# Altium PCB PCB_Working.PcbDoc
Units mil, origin at the board's own origin, x right, y up, seen from the top; angles counter-clockwise.
Board outline 6850 x 6635 mil, 2 copper layers (Top Layer, Bottom Layer); 104 components, 79 nets, 346 pads, 70 vias.
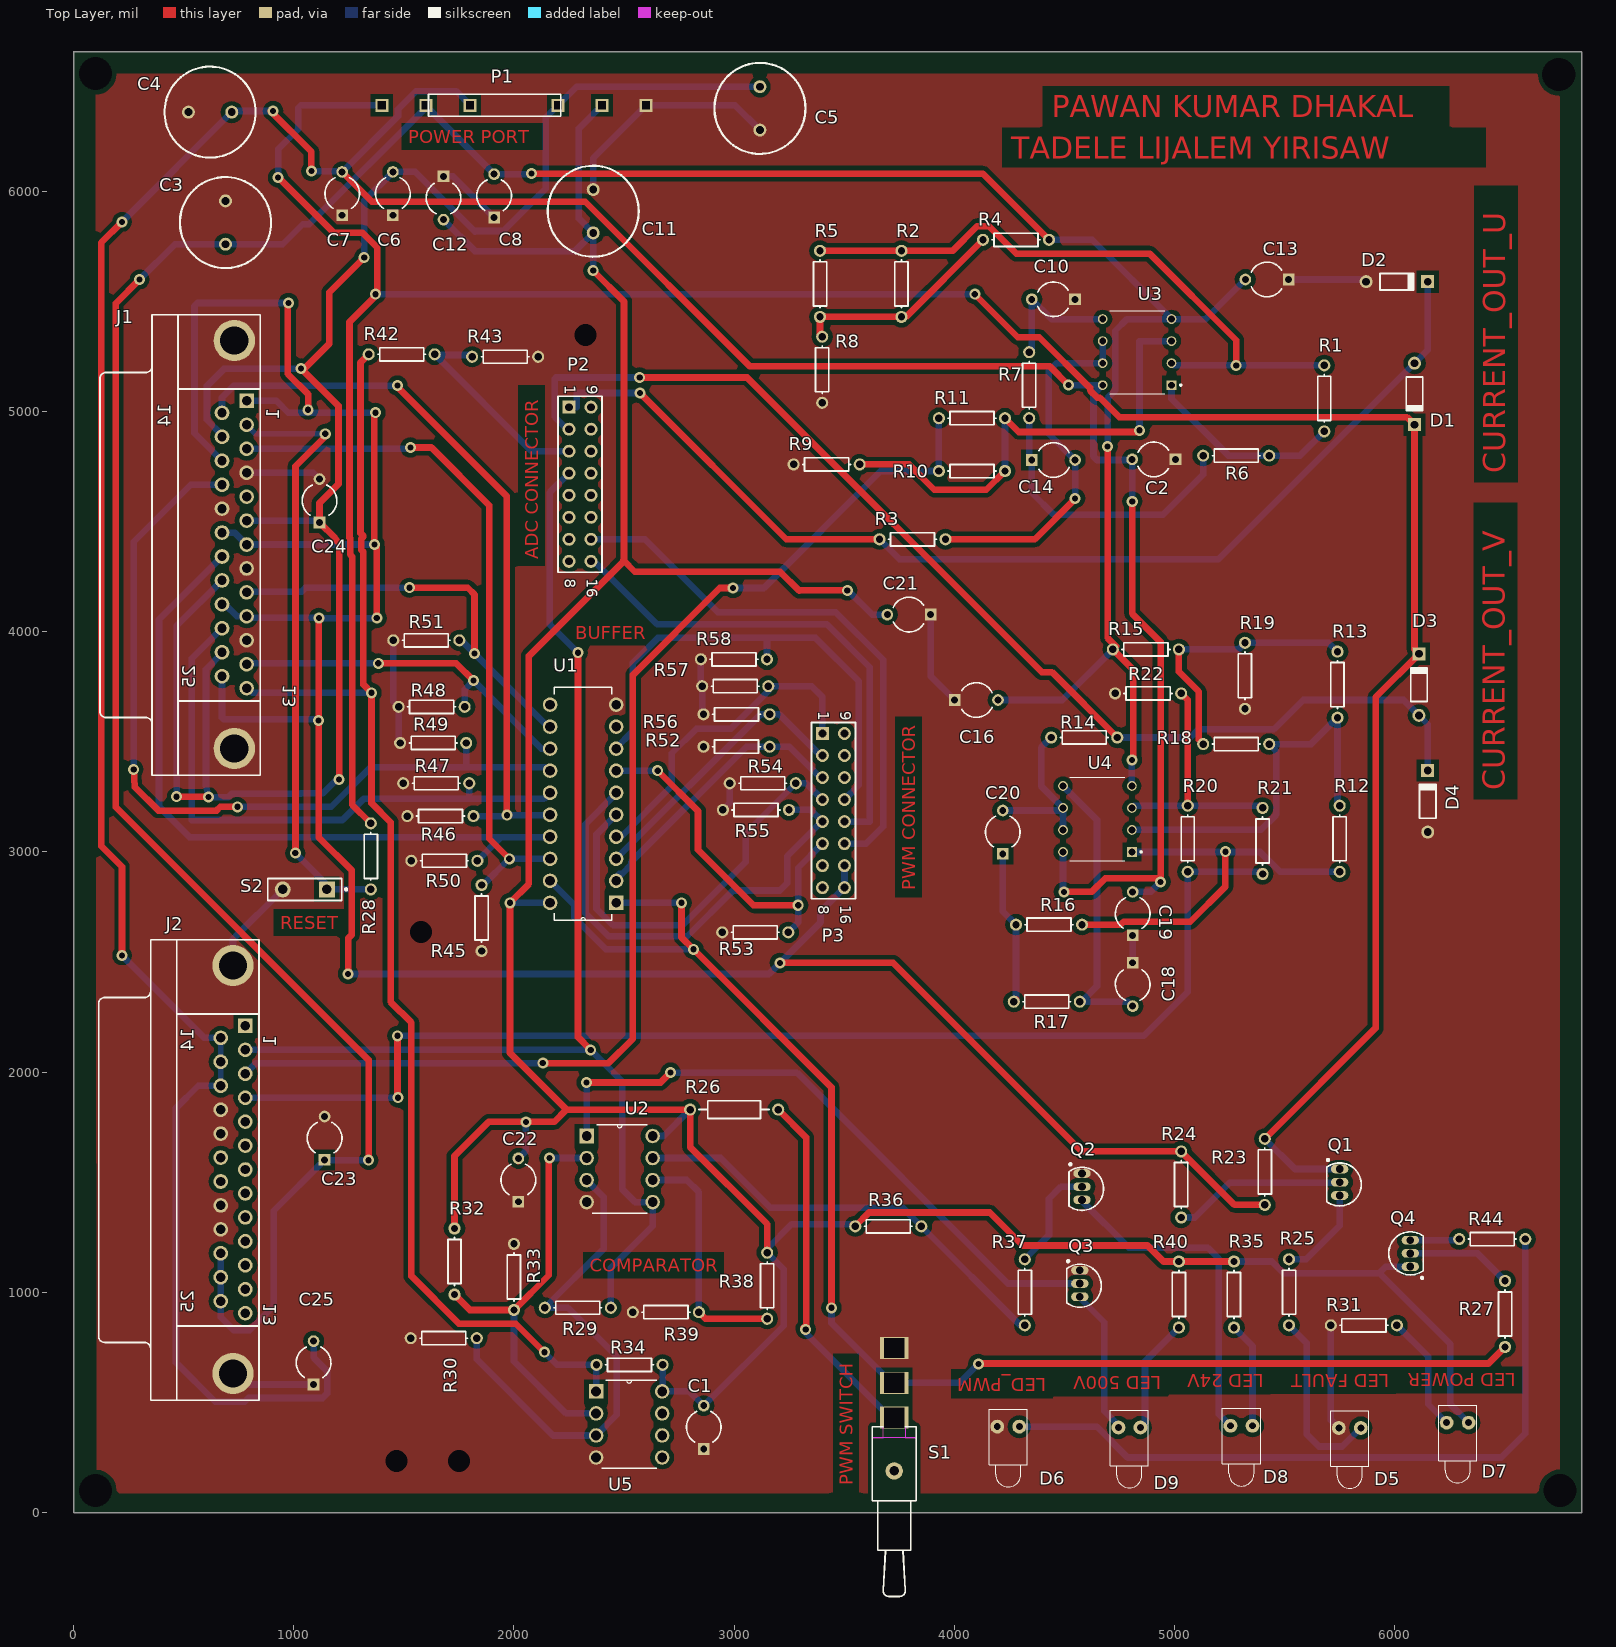
[diagram p0: Top Layer view]
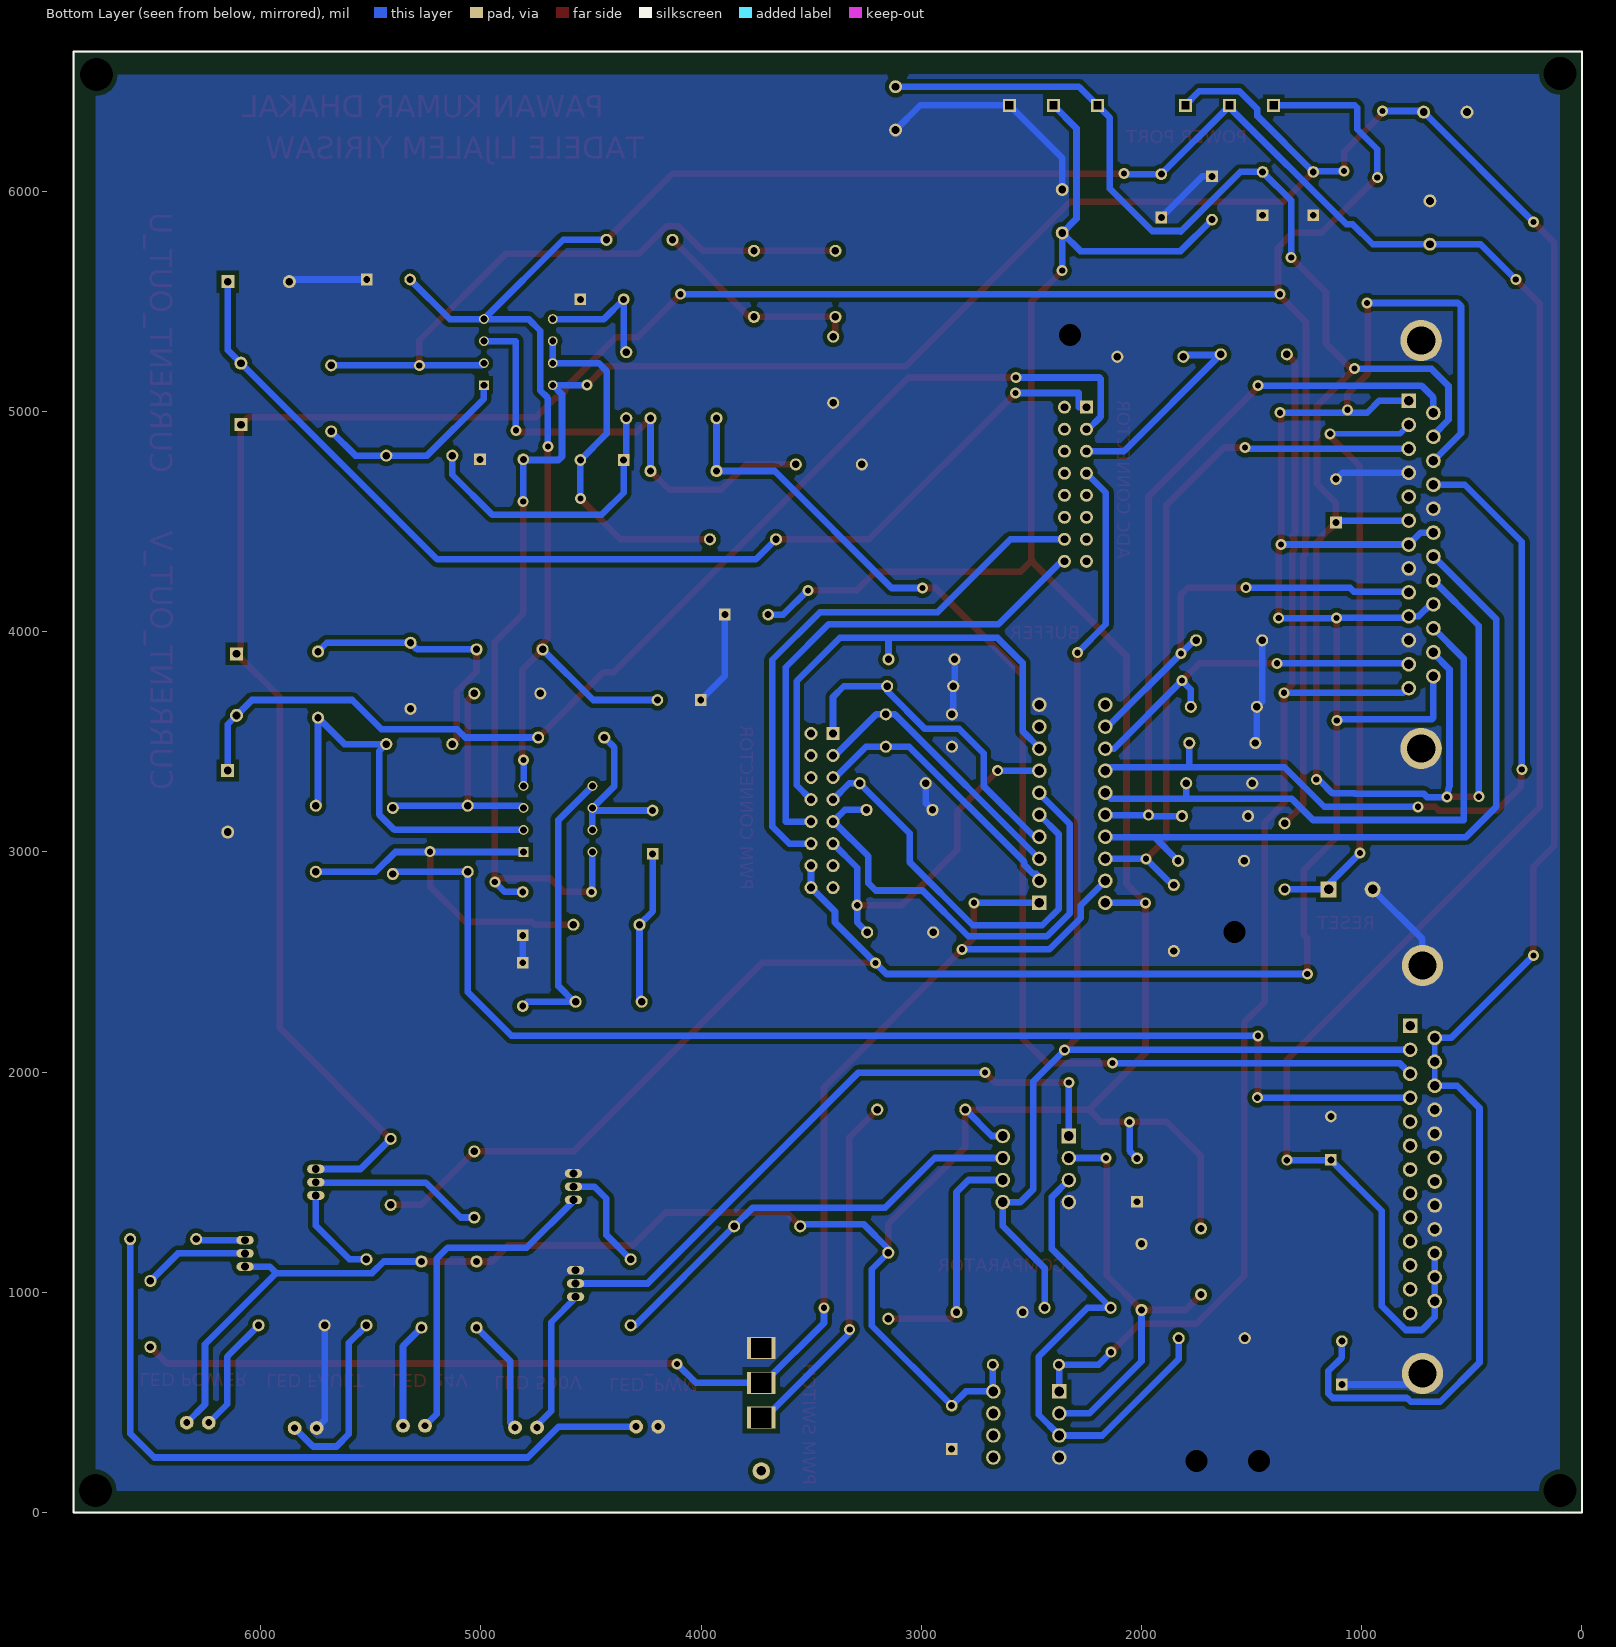
[diagram p1: Bottom Layer view, seen from below]

## Layer stack, top to bottom
Top Solder: solder mask 0.4, Solder Resist, Dk 3.5
Top Layer: signal copper 1.4
Dielectric 1: dielectric 12.6, FR-4, Dk 4.8
Bottom Layer: signal copper 1.4
Bottom Solder: solder mask 0.4, Solder Resist, Dk 3.5

## Board outline
0,0 0,6635 6850,6635 6850,0

## Design rules (kind name [scope] priority, off if disabled: settings)
Clearance [All] p1: gap=20
HoleSize [All] p1: absolutevalues=TRUE maxlimit=300 minlimit=20 maxpercent=80.000 minpercent=20.000
MinimumSolderMaskSliver [All] p1: minsoldermaskwidth=1
PlaneConnect [All] p1: planeconnectstyle=Direct reliefexpansion=20 reliefentries=4 reliefconductorwidth=10 reliefairgap=10
PolygonConnect [All] p1: connectstyle=Direct reliefconductorwidth=10 reliefentries=4 polygonreliefangle="90 Angle" airgapwidth=10
RoutingPriority [InNet('GND')] p1: routingpriority=82
RoutingVias [All] p1: holewidth=28 width=50 viastyle="Through Hole" minholewidth=28 minwidth=50 maxholewidth=28 maxwidth=50
SilkToSilkClearance [All] p1: silktosilkclearance=0
SilkToSolderMaskClearance [IsPad] p1: minsilkscreentomaskgap=1 clearancetoexposedcopper=TRUE
SolderMaskExpansion [All] p1: expansion=4
Width "Net Tracks" [All] p1: maxlimit=100 minlimit=20 preferedwidth=30
24 further rules are at their usual default settings.

## Components (designator, comment, footprint, x,y, rotation, side; value= is the part's Value field where it differs from the comment)
C1 "Cap2" CAPR5-4X5 2862,387 r90 top
C2 "Cap2" CAPR5-4X5 4906,4783 r180 top
C3 "Cap Pol1" RB5-10.5 690,5858.43 r270 top
C4 "Cap Pol1" RB5-10.5 620,6360 r180 top
C5 "Cap Pol1" RB5-10.5 3117,6377 r270 top
C6 "Cap2" CAPR5-4X5 1450,5990 r90 top
C7 "Cap2" CAPR5-4X5 1220,5990 r90 top
C8 "Cap2" CAPR5-4X5 1910,5980 r90 top
C10 "Cap2" CAPR5-4X5 4450,5510 r180 top
C11 "Cap Pol1" RB5-10.5 2360,5910 r90 top
C12 "Cap2" CAPR5-4X5 1680,5970 r270 top
C13 "Cap2" CAPR5-4X5 5420,5600 r180 top
C14 "Cap2" CAPR5-4X5 4450,4780 r0 top
C16 "Cap2" CAPR5-4X5 4100,3690 r0 top
C18 "Cap2" CAPR5-4X5 4810,2398.42 r270 top
C19 "Cap2" CAPR5-4X5 4810,2720 r90 top
C20 "Cap2" CAPR5-4X5 4220,3090 r90 top
C21 "Cap2" CAPR5-4X5 3794,4078 r180 top
C22 "Cap2" CAPR5-4X5 2020,1510 r90 top
C23 "Cap2" CAPR5-4X5 1140,1700 r90 top
C24 "Cap2" CAPR5-4X5 1117,4595 r90 top
C25 "Cap2" CAPR5-4X5 1090,680 r90 top
D1 "Diode 1N914" DO-35 6090,5080 r270 top
D2 "Diode 1N914" DO-35 6010,5590 r0 top
D3 "Diode 1N914" DO-35 6110,3760 r90 top
D4 "Diode 1N914" DO-35 6150,3230 r90 top
D5 "LED1" LED-1 5796,384 r270 top
D6 "LED1" LED-1 4245,390 r270 top
D7 "LED1" LED-1 6286,408 r270 top
D8 "LED1" LED-1 5304,394 r270 top
D9 "LED1" LED-1 4795,386 r270 top
J1 "J1 CONNECTOR, CONTROL" DSUB1.385-2H25A 355.98,4396.22 r270 top
J2 "J2 CONNECTOR, SENSOR" DSUB1.385-2H25A 350.08,1557.8 r270 top
P1 "POWER CONNECTORS" HDR1X6 2162,6391 r180 top
P2 "CONNECTOR ADC CHANNEL" HDR2X8_CEN 2250,5020 r270 top
P3 "CONNECTOR PWM" HDR2X8_CEN 3401,3538 r270 top
Q1 "2N3906" TO-92A#1 5750,1490 r180 top
Q2 "2N3904" TO-92A#1 4580,1470 r180 top
Q3 "2N3904" TO-92A#1 4570,1030 r180 top
Q4 "2N3906" TO-92A#2 6071,1177 r0 top
R1 "Res1" AXIAL-0.3 5680,5060 r90 top
R2 "Res1" AXIAL-0.3 3760,5580 r270 top
R3 "Res1" AXIAL-0.3 3810,4420 r180 top
R4 "Res1" AXIAL-0.3 4280,5780 r180 top
R5 "Res1" AXIAL-0.3 3390,5580 r270 top
R6 "Res1" AXIAL-0.3 5280,4800 r0 top
R7 "Res1" AXIAL-0.3 4340,5120 r270 top
R8 "Res5" AXIAL-0.3 3400,5190 r90 top
R9 "Res1" AXIAL-0.3 3420,4760 r180 top
R10 "Res1" AXIAL-0.3 4080,4730 r180 top
R11 "Res1" AXIAL-0.3 4080,4970 r180 top
R12 "Res1" AXIAL-0.3 5750,3060 r90 top
R13 "Res1" AXIAL-0.3 5740,3760 r90 top
R14 "Res1" AXIAL-0.3 4590,3520 r0 top
R15 "Res1" AXIAL-0.3 4870,3920 r0 top
R16 "Res1" AXIAL-0.3 4430,2670 r0 top
R17 "Res1" AXIAL-0.3 4420,2320 r180 top
R18 "Res1" AXIAL-0.3 5280,3490 r180 top
R19 "Res5" AXIAL-0.3 5320,3800 r90 top
R20 "Res1" AXIAL-0.3 5060,3060 r270 top
R21 "Res1" AXIAL-0.3 5400,3050 r270 top
R22 "Res1" AXIAL-0.3 4880,3720 r180 top
R23 "Res1" AXIAL-0.3 5410,1547 r90 top
R24 "Res1" AXIAL-0.3 5030,1490 r270 top
R25 "Res1" AXIAL-0.3 5520,1000 r90 top
R26 "Res2" AXIAL-0.4 3000,1830 r180 top
R27 "Res1" AXIAL-0.3 6501,902 r270 top
R28 "Res1" AXIAL-0.3 1350,2980 r270 top
R29 "Res1" AXIAL-0.3 2290,930 r180 top
R30 "Res1" AXIAL-0.3 1681,792 r0 top
R31 "Res1" AXIAL-0.3 5860,850 r0 top
R32 "Res1" AXIAL-0.3 1730,1140 r90 top
R33 "Res1" AXIAL-0.3 2000,1070 r270 top
R34 "Res1" AXIAL-0.3 2525,671 r180 top
R35 "Res1" AXIAL-0.3 5270,990 r90 top
R36 "Res1" AXIAL-0.3 3700,1300 r0 top
R37 "Res1" AXIAL-0.3 4320,1000 r90 top
R38 "Res1" AXIAL-0.3 3150,1030 r90 top
R39 "Res1" AXIAL-0.3 2690,910 r0 top
R40 "Res1" AXIAL-0.3 5020,990 r90 top
R42 "Res1" AXIAL-0.3 1490,5260 r180 top
R43 "Res1" AXIAL-0.3 1960,5249 r180 top
R44 "Res1" AXIAL-0.3 6443,1242 r0 top
R45 "Res1" AXIAL-0.3 1853,2700 r270 top
R46 "Res1" AXIAL-0.3 1666,3163 r180 top
R47 "Res1" AXIAL-0.3 1647,3312 r180 top
R48 "Res1" AXIAL-0.3 1633,3495 r180 top
R49 "Res1" AXIAL-0.3 1626,3659 r180 top
R50 "Res1" AXIAL-0.3 1684,2960 r180 top
R51 "Res1" AXIAL-0.3 1602,3961 r180 top
R52 "Res1" AXIAL-0.3 3011,3478 r180 top
R53 "Res1" AXIAL-0.3 3096,2635 r180 top
R54 "Res1" AXIAL-0.3 3130,3312 r180 top
R55 "Res1" AXIAL-0.3 3099,3191 r180 top
R56 "Res1" AXIAL-0.3 3011,3625 r180 top
R57 "Res1" AXIAL-0.3 3005,3753 r180 top
R58 "Res1" AXIAL-0.3 2999,3875 r180 top
S1 "SW-SPDT" TL36WW15050 3727,389 r270 top
S2 "SW-PB" SPST-2 1050,2830 r180 top
U1 "SN74HCT541N" DIP254P762X508-20 2164,3669 r180 top
U2 "LM393N" DIP254P762X508-8 2630,1410 r0 top
U3 "TL082CP" DIP794W45P254L959H508Q8 4830,5270 r180 top
U4 "TL082CP" DIP794W45P254L959H508Q8 4650,3150 r180 top
U5 "LM393N" DIP254P762X508-8 2673,250 r0 top

## Footprints (in the part's own frame and the unit in brackets; to place one, negate y for a bottom-side part, rotate by r counter-clockwise, add the part's x,y. Pads: shape width x height; smd on the part's side, far side on the other; paste and mask are expansions set on the pad)
AXIAL-0.3 [mm] "Axial Device, Thru-Hole; 2 Leads; 0.3 in Pin Spacing"
  round 1.4 hole 0.85: 1(-3.81,0) 2(3.81,0)
  silkscreen extent -2.77,-0.76 2.77,0.76
AXIAL-0.4 [mm] "Axial Device, Thru-Hole; 2 Leads; 0.4 in Pin Spacing"
  round 1.4 hole 0.85: 1(-5.08,0) 2(5.08,0)
  silkscreen extent -4.06,-1.02 4.06,1.02
CAPR5-4X5 [mm] "Capacitor; 2 Leads"
  rect 1.35x1.35 hole 0.8: 1(-2.5,0)
  round 1.35 hole 0.8: 2(2.5,0)
  silkscreen extent -1.69,-2 1.82,2
DIP254P762X508-8 [mil]
  rect 66x66 hole 44: 1(-300,300)
  round 66 hole 44: 2(-300,200) 3(-300,100) 4(-300,0) 5(0,0) 6(0,100) 7(0,200) 8(0,300)
  silkscreen extent -275,-50 -25,350
DIP254P762X508-20 [mil]
  rect 66x66 hole 44: 1(-300,900)
  round 66 hole 44: 2(-300,800) 3(-300,700) 4(-300,600) 5(-300,500) 6(-300,400) 7(-300,300) 8(-300,200) 9(-300,100) 10(-300,0) 11(0,0) 12(0,100) 13(0,200) 14(0,300) 15(0,400) 16(0,500) 17(0,600) 18(0,700) 19(0,800) 20(0,900)
  silkscreen extent -280,-80 -20,980, body extent -215,-500 215,500, height 200
DIP794W45P254L959H508Q8 [mm]
  rect 1.13x1.13 hole 0.78: 1(-3.97,3.81)
  round 1.13 hole 0.78: 2(-3.97,1.27) 3(-3.97,-1.27) 4(-3.97,-3.81) 5(3.97,-3.81) 6(3.97,-1.27) 7(3.97,1.27) 8(3.97,3.81)
  silkscreen extent -5.13,-4.8 3.18,4.8
DO-35 [mm] "Diode, Axial; Body 3.8 x 1.9 mm (LxDia. max), Lead Dia. 0.53 mm (max)"
  round 1.5 hole 0.9: 1(-3.55,0)
  rect 1.5x1.5 hole 0.9: 2(3.55,0)
  silkscreen extent -1.95,-0.95 2.05,0.95
DSUB1.385-2H25A [mm] "Connector; D Subminiature; 25 Position; Right Angle; Pitch 1.385 mm"
  rect 1.69x1.69 hole 1.09: 1(-16.566,10.92)
  round 1.69 hole 1.09: 2(-13.805,10.92) 3(-11.044,10.92) 4(-8.283,10.92) 5(-5.522,10.92) 6(-2.761,10.92) 7(0,10.92) 8(2.761,10.92) 9(5.522,10.92) 10(8.283,10.92) 11(11.044,10.92) 12(13.805,10.92) 13(16.566,10.92) 14(-15.185,8.08) 15(-12.424,8.08) 16(-9.663,8.08) 17(-6.902,8.08) 18(-4.141,8.08) 19(-1.38,8.08) 20(1.381,8.08) 21(4.142,8.08) 22(6.903,8.08) 23(9.664,8.08) 24(12.425,8.08) 25(15.186,8.08)
  round 4.76 hole 3.26: 26(-23.526,9.5) 27(23.526,9.5)
  silkscreen extent -26.5,-6 26.6,12.5
HDR1X6 [mm] "Connector; Header; 6 Position"
  rect 1.5x1.5 hole 0.9 square: 1(-11.125,0) 2(-6.045,0) 3(-0.965,0) 4(9.195,0) 5(14.275,0) 6(19.355,0)
  silkscreen extent -1.27,-1.27 13.97,1.27
HDR2X8_CEN [mm] "Connector; Header; 8x2 Position"
  rect 1.5x1.5 hole 0.9: 1(0,0)
  round 1.5 hole 0.9: 2(2.54,0) 3(5.08,0) 4(7.62,0) 5(10.16,0) 6(12.7,0) 7(15.24,0) 8(17.78,0) 9(0,2.54) 10(2.54,2.54) 11(5.08,2.54) 12(7.62,2.54) 13(10.16,2.54) 14(12.7,2.54) 15(15.24,2.54) 16(17.78,2.54)
  silkscreen extent -1.27,-1.27 19.05,3.81
LED-1 [mm] "LED; 2 Leads"
  round 1.6 hole 0.8: 1(0,1.27) 2(0,-1.27)
  silkscreen extent -2,-2.2 6.95,2.2
RB5-10.5 [mm] "Capacitor (Radial); 2 Leads"
  round 1.5 hole 0.9: 1(-2.5,0) 2(2.5,0)
  silkscreen extent -5.25,-5.25 5.25,5.25
SPST-2 [mm] "Switch; 2 Leads"
  rect 1.85x1.85 hole 1.1: 1(-2.54,0)
  round 1.85 hole 1.1: 2(2.54,0)
  silkscreen extent -4.89,-1.27 4.28,1.27
TL36WW15050 [mil] "Switch; 4 Leads"
  rect 100x130 hole 90 square: 1(-42,0) 2(-200,0) 3(-358,0)
  round 78.74 hole 43.31: M(200,0)
  Top Layer keep-out region: -0.04,-50 -0.04,-100 49.96,-100 49.96,-50
  Top Layer keep-out region: -0.04,100 -0.04,50 49.96,50 49.96,100
  Top Layer keep-out region: 49.96,100 49.96,-100 334.96,-100 334.96,100
  silkscreen extent 0,-100 770,100
TO-92A#1 [mm] "TO, Flat Index; 3 In-Line, Axial Leads; Body Dia. 4.5mm; Leads 0.51 x 0.48 mm (max)"
  oval 2x1 hole 0.9: 1(0,-1.778) 2(0,-0.254) 3(0,1.27)
  silkscreen extent -2.48,-2.95 1.5,2.48, body extent -2.5,-2.5 1.5,2.5, height 6.86
TO-92A#2 [mm] "TO, Flat Index; 3 In-Line, Axial Leads; Body Dia. 4.5mm; Leads 0.51 x 0.48 mm (max)"
  oval 2x1 hole 0.9: 1(0,-1.524) 2(0,0) 3(0,1.524)
  silkscreen extent -2.48,-2.95 1.5,2.48, body extent -2.5,-2.5 1.5,2.5, height 6.86

## Part data
C1 C2 C6 C7 C8 C10 C12 C13 C14 C16 C18 C19 C20 C21 C22 C23 C24 C25: "Capacitor"
C3 C4 C5 C11: "Polarized Capacitor (Radial)"
D1 D2 D3 D4: "High Conductance Fast Diode"
D5 D6 D7 D8 D9: "Typical RED GaAs LED"
J1 J2: library part "D Connector 25", "Receptacle Assembly, 25 Position, Right Angle"
P1: library part "Header 6", "Header, 6-Pin"
P2 P3: library part "Header 8X2A", "Header, 8-Pin, Dual row"
Q1 Q4: "PNP General Purpose Amplifier"
Q2 Q3: "NPN General Purpose Amplifier"
R1 R2 R3 R4 R5 R6 R7 R9 R10 R11 R12 R13 R14 R15 R16 R17 R18 R20 R21 R22 R23 R24 R25 R26 R27 R28 R29 R30 R31 R32 R33 R34 R35 R36 R37 R38 R39 R40 R42 R43 R44 R45 R46 R47 R48 R49 R50 R51 R52 R53 R54 R55 R56 R57 R58: "Resistor"
R8 R19: library part Res1, "Resistor"
S1: "SPDT Subminiature Toggle Switch, Right Angle Mounting, Vertical Actuation"
S2: "Switch"
U1: "Octal Buffers and Line Drivers With 3-State Outputs 20-PDIP -40 to 85"
U2 U5: "Comparator General Purpose CMOS, DTL, ECL, MOS, Open-Collector, TTL 8-DIP"
U3 U4: "Dual High Slew Rate JFET-Input Operational Amplifier 8-PDIP 0 to 70"

## Free pads (board coordinates)
  round 0 hole 150 unplated: 0(100,6535) 1(6745,6530) 2(6750,100) 3(100,100)
  round 60 hole 100: 0(1466,235) 0(1578,2637) 1(1750,235) 1(2324,5348)

## Via types
v1: diameter 50, hole 28, Top Layer to Bottom Layer, 70 vias

## Nets (pads, with @x,y where several pads share a name; then routed paths per layer and width w, separated by ;. In a path a pad name is that pad's centre, name@x,y a point inside that pad or via, vN(x,y) a via of type N, cw(c..) or ccw(c..) an arc to the next point about the centre after c; other vN are vias at no path point)
GND: C1.1 C2.1 C3.1 C4.2 C5.2 C6.1 C7.1 C8.1 C10.1 C11.2 C12.1 C13.1 C16.1 C18.1 C19.1 C21.1 C22.1 C23.2 C24.2 C25.1 D2.1 D4.1 D5.2 D6.2 J1.4 J1.8 J1.11 J1.18 J1.26 J1.27 J2.17 J2.18 J2.21 J2.22 J2.26 J2.27 P1.1 pad.0@1466,235 pad.0@1578,2637 pad.1@1750,235 pad.1@2324,5348 Q2.1 Q3.1 R8.1 R9.2 R19.1 R22.2 R30.1 R31.1 R33.1 R39.1 R43.1 R45.2 R46.2 R47.2 R48.2 R49.2 R50.2 R51.2 R52.2 R53.2 R54.2 R55.2 R56.2 R57.2 R58.2 S1.3 S2.2 U1.10 U2.4 U5.4 | length 4793.2
  Bottom Layer w20: J1.18 J1.18@675.18,4558.19 ; J1.11@787.32,3960 J1.11@789.32,3958
  Bottom Layer w30: J2.27 774.1,581.58 C25.1 ; J2.26 724.1,2604.1 S2.2 ; J1.11 J1.11@787.32,3960 ; J1.4 1088.11,4722.32 C24.2 ; R51.2 1452,3683 R49.2 1476,3502 R48.2 ; C12.1 1723.15,6068.42 C8.1 ; C22.1 C22.1@2021.57,1410 ; C11.2 2360,6151 P1.1 3004.58,6391 C5.2 ; R58.2 2849,3759 R57.2 2855,3631 R56.2 ; R55.2 2980,3222 R54.2 ; C21.1 3892.42,3799.15 C16.1 ; C18.1 C19.1 ; C13.1 5860.24,5600 D2.1 ; R31.1 5710,420 D5.2
NetC1_2: C1.2 C11.1 C12.2 C21.2 C22.2 D7.1 P1.2 Q4.1 R26.2 R32.2 R34.1 R35.2 R36.1 R38.2 R40.2 U1.20 U2.8 U5.8 | length 15163.8
  Top Layer w30: R32.2 1730,1619 1885,1774 v1(2054,1774) 2183,1774 2239,1830 ; C22.2@2020,1596 C22.2 ; v1(2360,5640) 2500,5500 2500,4322 2068,3890 2068,2855 v1(1982,2769) 1982,2087 2239,1830 ; 2497,4325 2549,4273 3208.57,4273 3294.79,4186.79 3296,4188 v1(3514,4188) ; R38.2 3150,1310 2800,1660 R26.2 2239,1830 ; R36.1@3540,1310 R36.1 3612.56,1362.56 4160.44,1362.56 4310.44,1212.56 4877.44,1212.56 4950,1140 R40.2 R35.2
  Bottom Layer w30: C12.2 1822.57,5729 2277.42,5729 C11.1 ; v1(1982,2769) U1.20 ; C22.2 2054,1642.42 v1(2054,1774) ; v1(2360,5640) C11.1 ; P1.2 2295,6286 2295,5876.58 C11.1 ; U2.8 2680,1710 R26.2 ; R34.1 2675,552 U5.8 2797.43,550 C1.2 3225,848.42 3225,1105 R38.2 3150,1198 3262,1310 R36.1@3540,1310 ; v1(3514,4188) 3517.02,4188 3627.02,4078 C21.2 ; R35.2 5441.53,1140 5494.09,1087.44 5929.56,1087.44 ; Q4.1 5959.12,1117 5929.56,1087.44 ; D7.1 6253,491 6253,764 5929.56,1087.44
NetC2_2: C2.2 C4.1 C7.2 C19.2 C25.2 J2.14 J2.15 J2.16 P1.4 U3.8 U4.8 | length 16000.3
  Top Layer w30: v1(220,2530) 220,2933 126,3027 126,5767.58 v1(220,5861.58) ; v1(906,6365) 895,6365 1080,6180 v1(1080,6092) ; C7.2 1355.28,5953.15 2324.02,5953.15 3072.17,5205 4434,5205 v1(4519,5120) ; v1(4497.43,2818.43) 4623.43,2818.43 4685,2880 4921,2880 v1(4937,2864) 4937,3954 4807.57,4083.43 4807.57,4591.57 v1(4808,4592)
  Bottom Layer w25: J2.16 J2.15 J2.14
  Bottom Layer w30: v1(220,2530) 594.35,2155.65 J2.14 ; v1(220,5861.58) C4.1 723.42,6365 v1(906,6365) ; J2.16 566.25,1938.25 465,1837 465,681 643.12,502.88 777.41,502.88 794.53,520 1131.07,520 1151.57,540.5 1151.57,643.15 1090,704.72 C25.2 C25.2@1089.43,779 ; v1(1080,6092) 1211.57,6092 1217.57,6086 C7.2 1473.59,6342.01 1473.59,6373.14 1555.97,6455.53 1737.53,6455.53 1800,6393.06 P1.4 ; U4.8 4493.7,2822.15 v1(4497.43,2818.43) ; v1(4519,5120) U3.8 4632,5078.3 4632,4796 4648,4780 C2.2@4807.57,4780 ; C2.2 C2.2@4807.57,4780 ; v1(4808,4592) 4807.57,4592.43 C2.2@4807.57,4780 ; C19.2 4891.43,2818.43 v1(4937,2864)
NetC3_2: C3.2 C8.2 C13.2 C16.2 C23.1 J2.23 J2.24 J2.25 P1.5 R4.1 R15.1 U3.4 U4.4 | length 14951.3
  Top Layer w30: v1(300,5600) 192,5492 192,3203 1340,2055 v1(1340,1600) ; v1(2079,6081) 4129,6081 R4.1 ; v1(4696,4842) 4696,3972 4734,3934 R15.1 4813,3827 4813,3424.4 v1(4806.3,3417.7)
  Bottom Layer w30: v1(300,5600) 460,5760 C3.2 950,5760 1041,5851 1069.65,5851 1600,6381.35 P1.5@1600,6388.42 ; J2.23 J2.24 J2.25 668.19,887.52 726.71,829 799.95,829 909,938.05 909,1370.58 C23.1 1141.58,1600 v1(1340,1600) ; P1.5 P1.5@1600,6388.42 ; v1(2079,6081) 2076.42,6078.42 C8.2 P1.5@1600,6388.42 ; C16.2 4490,3690 R15.1 ; R4.1 4626.3,5780 U3.4 ; v1(4696,4842) 4696,5061.34 4730.94,5096.29 4730.94,5366.94 4784,5420 U3.4 ; U4.4 v1(4806.3,3417.7) ; C13.2 5141.57,5420 U3.4
NetC5_1: C5.1 C6.2 C24.1 J1.6 J1.15 J1.21 J1.24 P1.3 | length 8927.8
  Top Layer w30: v1(468,3251) 611,3251 v1(613,3249) ; v1(1206,3329) 1206,4403.57 1186,4423.57 1188,4425.57 C24.1 1117,4585 1203,4671 1203,5026 v1(1033,5196) 1049,5196 1162,5309 1162,5542 v1(1320,5700)
  Bottom Layer w20: J1.6 793.83,4497 J1.6@797.83,4501
  Bottom Layer w30: v1(468,3251) 468,4027.08 J1.21 ; J1.24 674.09,3902.09 601.3,3829.3 601.3,3299.7 v1(613,3249) 703.15,3249 719.15,3265 1031,3265 1032,3266 1132,3266 1188,3322 1189,3321 1197,3329 v1(1206,3329) ; J1.15 674.09,4893.91 605,4963 605.83,4963.83 605.83,5116.81 682.75,5193.74 1030.74,5193.74 v1(1033,5196) ; J1.6 1108.65,4504.92 C24.1 ; v1(1320,5700) 1320,5958.43 C6.2 1551.57,6088.43 1822,5818 1824,5820 1951.07,5820 2144,6012.93 2144,6335 P1.3 2284.43,6475.43 C5.1
NetC10_2: C10.2 R7.1 U3.5 | length 604.2
  Bottom Layer w30: R7.1 4351.58,5281.58 C10.2 4441.58,5420 U3.5
NetC14_1: C14.1 R6.1 R7.2 | length 1325
  Bottom Layer w30: R7.2 4340,4791.58 C14.1 4351.58,4631.42 4451,4532 4949,4532 5130,4713 R6.1
NetC14_2: C14.2 R3.1 U3.6 U3.7 | length 1654.6
  Top Layer w30: R3.1 4366,4420 v1@4548.43,4602.43
  Bottom Layer w30: v1@4548.43,4602.43 C14.2 4429,4899.43 4429,5184 4465,5220 U3.7 U3.6
  other v1: 4548.43,4606
NetC18_2: C18.2 R17.1 U4.5 | length 1321.6
  Bottom Layer w30: U4.5 4648,3145.7 4648,2390.88 R17.1@4577.12,2320 ; R17.1 R17.1@4577.12,2320 ; C18.2 4790,2320 R17.1@4577.12,2320
NetC20_1: C20.1 R16.1 R17.2 | length 700.6
  Top Layer w30: R17.2 R17.2@4280,2330
  Bottom Layer w30: C20.1 4220,2730 R16.1 R17.2@4280,2330
NetC20_2: C20.2 R14.1 U4.6 U4.7 | length 758.8
  Bottom Layer w30: C20.2 4482.12,3188.42 U4.6 ; R14.1 4394,3474 4394,3299.7 U4.6 ; U4.7 U4.6
NetD1_1: D1.1 D2.2 P2.1 R3.2 | length 4981.4
  Top Layer w30: v1(2572.47,5084.53) 3237,4420 R3.2
  Bottom Layer w30: P2.1 2285.47,5020 2285.47,5084.53 v1(2572.47,5084.53) ; R3.2 3751,4329 5199.24,4329 D1.1 6149.76,5279.53 D2.2
NetD1_2: D1.2 D3.2 P1.6 Q1.1 R23.2 R28.1 | length 12938.4
  Top Layer w30: v1(929,6063) 931,6063 1181,5813 1311.43,5813 1380,5744.43 1380,5534 1253,5407 1253,4427.28 1256,4424.28 1256,4351.44 1266,4341.44 1266,3214 R28.1 ; v1(4093,5533) 4288,5338 4385.85,5338 4616.46,5107.4 4616.46,5096.29 4649.99,5062.76 4661.1,5062.76 4748.85,4975 6055.24,4975 D1.2 6090,3919.76 D3.2 5913,3702.76 5913,2200 R23.2
  Bottom Layer w30: v1(929,6063) 929,6191 1020.5,6282.5 1020.5,6380 1031.5,6391 P1.6 ; v1(1371,5533) v1(4093,5533) ; R23.2 5547,1560 Q1.1
NetD3_1: D3.1 D4.2 P2.2 R14.2 | length 5231.6
  Top Layer w30: v1(2571,5155) 3059,5155 4397,3817 4443,3817 R14.2
  Bottom Layer w30: P2.2 2241.45,4920 2185.47,4975.98 2185.47,5149.47 2191,5155 v1(2571,5155) ; R14.2 5071.53,3520 5108.53,3557 5451.47,3557 5584.47,3690 6040.24,3690 D3.1 6150,3580.24 D4.2
NetD5_1: D5.1 R25.1 | length 831.1
  Bottom Layer w30: R25.1 5600,770 5600,356 5656,300 5762,300 D5.1
NetD6_1: D6.1 R44.2 | length 3284.1
  Bottom Layer w30: D6.1 4646.96,390 4786.96,250 6484,250 6593,359 R44.2
NetD7_2: D7.2 R31.2 | length 535.6
  Bottom Layer w30: R31.2 6152,708 6152,492 D7.2
NetD8_1: D8.1 R35.1 | length 480.8
  Bottom Layer w30: R35.1 5354,756 D8.1
NetD8_2: D8.2 Q2.3 | length 1499.3
  Bottom Layer w30: Q2.3@4580,1415.32 4792.76,1202.56 5151.44,1202.56 5201,1153 5201,447 D8.2@5246,402
NetD9_1: D9.1 R40.1 | length 526.5
  Bottom Layer w30: D9.1 4866,407 4866,686 R40.1
NetD9_2: D9.2 Q3.3 | length 659.3
  Bottom Layer w30: Q3.3@4570,975.32 4681,864.32 4681,461 D9.2@4751,391
NetJ1_1: J1.1 J1.7 J1.10 J1.16 J1.19 J1.22 J1.25 P3.15 P3.16 R23.1 R24.1 | length 12240.5
  Top Layer w30: v1(976,5493) 973,5490 973,5171.15 1065,5079.15 v1(1065,5008) ; v1(1114,4063) 1113,4062 v1(1113,3597) 1113,3067 1263.91,2916.09 1263.91,2624.5 1247,2607.59 v1(1247,2446) ; v1(1371,4995) 1366,4990 v1(1366,4397) 1377,4386 v1(1377,4062) ; v1(3208,2496) 3723,2496 4579,1640 R24.1 5273,1397 R23.1
  Bottom Layer w20: J1.19@669.43,4450.57 J1.19 ; J1.22@674.09,4125.91 J1.22 J1.22@687.53,4124.47 ; J1.1 J1.1@788.48,5051 ; J1.10@786.02,4070 J1.10@788.02,4072
  Bottom Layer w25: J1.10@788.02,4072 J1.10@797.02,4063 ; J1.1@788.48,5051 799.48,5040 J1.1@808.48,5049
  Bottom Layer w30: J1.25 674.09,3610.09 682.19,3602 1108,3602 v1(1113,3597) ; J1.19 731.56,4450.57 J1.7 v1@1366,4396.22 ; J1.16 549,4901.77 549,5479 563,5493 v1(976,5493) ; J1.22@687.53,4124.47 741.88,4070.12 J1.10 J1.10@786.02,4070 ; J1.10@797.02,4063 v1(1114,4063) 1115,4062 v1(1377,4062) ; J1.1@808.48,5049 921,5049 975,4995 v1(1371,4995) ; v1(1247,2446) 3158,2446 v1(3208,2496) 3392,2680 3392,2729 P3.16 P3.15
NetJ1_2: J1.2 R28.2 S2.1 | length 2756.3
  Top Layer w30: v1@1008,2997 1008,4752 1143,4887 v1(1143,4899)
  Bottom Layer w20: J1.2@786.18,4940 J1.2@788.18,4938
  Bottom Layer w25: J1.2@788.18,4938 827.18,4899 v1(1143,4899)
  Bottom Layer w30: J1.2 J1.2@786.18,4940 ; v1(1007,2995) 1150,2852 S2.1 R28.2
NetJ1_3: J1.3 R45.1 U1.18 | length 3216.5
  Top Layer w30: v1(1530,4837) 1625,4837 1888,4574 1888,3060 v1(1979,2969)
  Bottom Layer w30: J1.3 1524,4831 v1(1530,4837) ; R45.1 1860,2850 v1(1979,2969) U1.18
NetJ1_9: J1.9 R51.1 U1.12 | length 1916
  Top Layer w30: v1(1525,4200) 1790,4200 1821,4169 v1(1821,3902)
  Bottom Layer w20: J1.9@787.09,4180 795.09,4172 J1.9@809.09,4186
  Bottom Layer w25: J1.9@809.09,4186 J1.9@813.09,4182
  Bottom Layer w30: J1.9 J1.9@787.09,4180 ; J1.9@813.09,4182 1035,4182 1053,4200 v1(1525,4200) v1@1533,4200 ; R51.1 1762,3961 v1(1821,3902) 2154,3569 U1.12
NetJ1_12: J1.12 R49.1 U1.13 | length 1682.5
  Top Layer w30: v1(1384,3857) 1737,3857 v1(1816,3778)
  Bottom Layer w25: J1.12@788.62,3850 J1.12@795.62,3857
  Bottom Layer w30: J1.12 J1.12@788.62,3850 ; J1.12@795.62,3857 v1(1384,3857) ; R49.1@1788,3659 1777,3670 1777,3739 v1(1816,3778) 2125,3469 U1.13
NetJ1_13: J1.13 R34.2 R42.2 U5.1 | length 6012.5
  Top Layer w30: R42.2 1303,5223 1303,4448 1316,4435 1316,4431.85 1306,4421.85 1306,4372.15 1316,4362.15 1316,3760 v1(1353,3723) 1353,3222 1440,3135 1440,2319.1 1534.1,2225 1534.1,1073.9 1750.56,857.44 2008.56,857.44 v1(2138,728)
  Bottom Layer w20: J1.13@799.92,3730 J1.13@801.92,3732
  Bottom Layer w25: J1.13@801.92,3732 J1.13@810.92,3723
  Bottom Layer w30: J1.13 J1.13@799.92,3730 ; J1.13@810.92,3723 v1(1353,3723) ; v1(2138,728) 2195,671 R34.2 2373,669 U5.1
NetJ1_14: J1.14 R46.1 U1.16 | length 3396.1
  Top Layer w30: v1(1471.09,5117.91) 1471.09,5111.91 1968,4615 v1(1968,3167)
  Bottom Layer w30: J1.14 674.09,5063.38 728.62,5117.91 v1(1471.09,5117.91) ; R46.1 1964,3163 v1(1968,3167) 2162,3167 U1.16
NetJ1_17: J1.17 R48.1 U1.14 | length 3751.7
  Top Layer w30: v1(273,3375) 278,3295 385,3188 649,3188 666,3205 v1(744,3205)
  Bottom Layer w30: v1(273,3375) 273,4409 531.97,4667.97 J1.17 ; v1(744,3205) 1170,3205 1349,3384 1784,3384 ; R48.1 1783,3385 1784,3384 ; U1.14 2149,3384 1784,3384
NetJ1_20: J1.20 R50.1 U1.17 | length 3240.4
  Bottom Layer w30: J1.20 388,4055.78 388,3206 526.56,3067.44 1941.44,3067.44 ; R50.1 1941.44,3067.44 ; U1.17 2162.44,3067.44 1941.44,3067.44
NetJ1_23: J1.23 R47.1 U1.15 | length 2680.2
  Bottom Layer w30: J1.23 537,3878.67 537,3145 1221,3145 1317,3241 1805,3241 ; R47.1 1797,3249 1805,3241 ; U1.15 2136,3241 1805,3241
NetJ2_2: J2.2 P2.4 R29.1 U2.5 | length 5714.6
  Top Layer w30: v1(2291,3905) 2291,2159 v1(2348.7,2101.3)
  Bottom Layer w30: J2.2 v1(2348.7,2101.3) 2491,1959 2491,1469 2550,1410 U2.5 2630,1301 2440,1111 R29.1 ; P2.4 2162,4632 2162,4034 v1(2291,3905)
NetJ2_3: J2.3 R10.2 R11.2 | length 5491.6
  Top Layer w30: v1(2131,2041) 2429,2041 2540,2152 2540,3804 2935,4199 v1(2995,4199)
  Bottom Layer w30: J2.3 828.4,2041 v1(2131,2041) ; v1(2995,4199) 3135,4199 3666,4730 R10.2 R11.2
NetJ2_4: J2.4 R20.2 R21.2 | length 5538.1
  Top Layer w30: v1(1471,2165) 1471,1887 v1(1474.1,1883.9) ; R21.2@5390,2910 R21.2
  Bottom Layer w30: J2.4 v1(1474.1,1883.9) ; v1(1471,2165) 4861,2165 5060,2364 R20.2 R21.2@5390,2910
NetJ2_5: J2.5
NetJ2_19: J2.19 | length 1
  Bottom Layer w30: J2.19@667.15,1612.15 J2.19
NetJ2_20: J2.20 | length 12.7
  Bottom Layer w30: J2.20@655.45,1503.45 J2.20
NetP2_3: P2.3 R42.1 R43.2 | length 962.3
  Bottom Layer w30: R42.1 R42.1@1643,5257 ; R43.2@1813,5257 R42.1@1643,5257 ; P2.3 2080,4820 R42.1@1643,5257
NetP2_5: P2.5
NetP2_6: P2.6
NetP2_7: P2.7
NetP2_8: P2.8
NetP2_12: P2.12
NetP2_14: P2.14
NetP2_15: P2.15 P3.14 | length 2519.1
  Bottom Layer w30: P2.15 2595.09,4420 2926.09,4089 3460.54,4089 3677,3872.54 3677,3115.15 3599.85,3038 P3.14
NetP2_16: P2.16 P3.13 | length 2282.7
  Bottom Layer w30: P2.16 2364,4320 2650,4034 3421,4034 3616,3839 3616,3137 3502,3137 P3.13
NetP3_1: P3.1 R57.1 U1.4 | length 1507
  Bottom Layer w30: U1.4 2487,3069 2717,3299 2717,3448 2828,3559 2983.29,3559 3155,3730.71 R57.1 3352,3753 3401,3704 P3.1
NetP3_2: P3.2 R56.1 U1.3 | length 1286.2
  Bottom Layer w30: U1.3 3120,3625 R56.1 3205.45,3625 3392.45,3438 P3.2
NetP3_3: P3.3 R52.1 U1.2 | length 1273.9
  Bottom Layer w30: U1.2 2464,2886 2479,2901 2492.17,2901 2532,2940.83 2532,2954 3056,3478 R52.1 3251,3478 3391,3338 P3.3 P3.3@3410,3338
NetP3_4: P3.4 R54.1 U1.5 | length 1913.9
  Bottom Layer w30: U1.5 2375,3080 2375,2742.5 2450.5,2667 2766,2667 3053,2954 3053,3085 R54.1 3327,3312 P3.4 ; P3.4@3386.63,3233.63 P3.4@3405.37,3233.63
NetP3_5: P3.5 R55.1 U1.6 | length 2188
  Bottom Layer w30: U1.6 2464,3265.17 2325,3126.17 2325,2721.79 2429.79,2617 2786.71,2617 2994.71,2825 3207,2825 3241,2859 3241,2981 3393.63,3133.63 P3.5@3405.37,3133.63 ; R55.1 3348,3191 P3.5
NetP3_6: P3.6 R53.1 U1.7 | length 1650.4
  Top Layer w30: v1(2653,3369) 2836,3186 2836,3010 3088,2758 v1(3291,2758)
  Bottom Layer w30: U1.7 v1(2653,3369) ; R53.1 3291,2680 v1(3291,2758) 3291,2928 P3.6
NetP3_7: P3.7
NetP3_8: P3.8
NetP3_9: P3.9
NetP3_10: P3.10
NetP3_11: P3.11
NetP3_12: P3.12 R58.1 U1.8 | length 2244.3
  Bottom Layer w30: U1.8 2460.17,3469 2540,3548.83 2540,3858 2654,3972 3154,3972 ; R58.1 3149,3967 3154,3972 ; P3.12 3566,3303 3566,3776 3370,3972 3154,3972
NetQ1_2: Q1.2 R24.2 | length 788.8
  Top Layer w20: Q1.2@5742,1498 Q1.2@5750,1490
  Bottom Layer w30: R24.2 5092,1340 5250,1498 Q1.2@5742,1498
NetQ1_3: Q1.3 R25.2 | length 436
  Bottom Layer w30: R25.2@5516,1146 R25.2 5597,1150 5750,1303 Q1.3
NetQ2_2: Q2.2 R37.2 | length 493.3
  Bottom Layer w30: R37.2 4430,1260 4430,1425 4485,1480 Q2.2
NetQ3_2: Q3.2 U2.1 | length 2898.5
  Top Layer w30: v1(2330,1953) 2666,1953 v1(2711,1998)
  Bottom Layer w30: U2.1 v1(2330,1953) ; v1(2711,1998) 3285,1998 4243,1040 Q3.2
NetQ4_2: Q4.2 R27.1 | length 481.8
  Bottom Layer w30: Q4.2 6376,1177 R27.1
NetQ4_3: Q4.3 R44.1 | length 224.1
  Bottom Layer w30: Q4.3 6288,1237 R44.1
NetR1_1: R1.1 R6.2 U3.1 | length 907.7
  Bottom Layer w30: U3.1 4986.3,5058.7 5245,4800 R6.2 5570,4800 R1.1
NetR1_2: R1.2 R2.1 R5.1 U3.2 | length 2963.3
  Top Layer w30: R5.1 R2.1 3991.53,5730 4104.09,5842.56 4155.91,5842.56 4281.03,5717.44 4886.56,5717.44 5280,5324 v1(5280,5210)
  Bottom Layer w30: U3.2 4996.3,5210 R1.2
NetR2_2: R2.2 R4.2 R5.2 R8.2 | length 979.1
  Top Layer w30: R8.2 3390,5350 R5.2 R2.2 3780,5430 R4.2
NetR9_1: R9.1 R10.1 R11.1 U3.3 | length 2173.2
  Top Layer w30: R9.1 3794,4760 3909,4645 4145,4645 R10.1 ; R11.1 4292.56,4907.44 4833.44,4907.44 v1(4841,4915)
  Bottom Layer w30: R10.1 R11.1 ; v1(4841,4915) 4841,5320 U3.3
NetR12_1: R12.1 R16.2 U4.1 | length 1861.6
  Top Layer w30: R16.2 4755.78,2670 4768.93,2683.15 5071.15,2683.15 5231,2843 v1(5231,3001)
  Bottom Layer w30: U4.1 5388.47,3000 5478.47,2910 R12.1
NetR12_2: R12.2 R13.1 R18.1 U4.2 | length 1782.3
  Bottom Layer w30: U4.2 5392,3100 5462.56,3170.56 5462.56,3457.44 R18.1 5620,3490 R13.1 5740,3220 R12.2
NetR13_2: R13.2 R15.2 R18.2 R19.2 | length 1224.6
  Top Layer w30: R15.2 5020,3818.47 5110,3728.47 5110,3510 R18.2
  Bottom Layer w30: R15.2 5290,3920 R19.2 5700,3950 R13.2
NetR20_1: R20.1 R21.1 R22.1 U4.3 | length 1124.4
  Top Layer w30: R22.1 5060,3690 R20.1 ; R21.1@5390,3210 R21.1
  Bottom Layer w30: U4.3 4816.3,3210 R20.1 R21.1@5390,3210
NetR26_1: R26.1 S1.1 | length 1632.1
  Top Layer w30: R26.1 3327,1703 3327,850.5 v1@3315,838.5
  Bottom Layer w30: v1(3325,832) 3325,815 3700.5,439.5 S1.1@3700.5,404.5
NetR27_2: R27.2 S1.2 U1.1 U1.19 | length 6539.4
  Top Layer w30: v1(2761,2769) 2761,2612 v1(2815,2558) 3442,1931 v1(3442,930) ; v1(4109,675) 4111,677 6426,677 R27.2
  Bottom Layer w30: U1.19 2275,2758 2275,2701.08 2418.08,2558 v1(2815,2558) ; U1.1 v1(2761,2769) ; v1(3442,930) 3442,861 3714,589 S1.2 4023,589 v1(4109,675)
NetR29_2: R29.2 R30.2 U2.3 U5.3 | length 2319.1
  Bottom Layer w30: R30.2 1831,697 2178,350 U5.3 2467,444 2467,708 2245,930 R29.2 2407,1197 2407,1433 U2.3
NetR32_1: R32.1 R33.2 U2.2 U5.2 | length 1930.6
  Top Layer w30: R32.1 1800.01,920 R33.2 2158,1078 v1@2158,1610
  Bottom Layer w30: R33.2 2000,687 2237,450 U5.2 ; v1@2158,1610 U2.2
  other v1: 2161,1610
NetR36_2: R36.2 R37.1 U2.7 | length 2004.8
  Bottom Layer w30: U2.7 2939,1610 3164,1385 3765,1385 R36.2 4300,850 R37.1
NetR38_1: R38.1 R39.2 U2.6 | length 1100.2
  Top Layer w30: R39.2 2870,880 R38.1
  Bottom Layer w30: U2.6 2785,1510 2840,1455 R39.2
NetU1_9: U1.9
pads on no net: J1.5 J2.1 J2.6 J2.7 J2.8 J2.9 J2.10 J2.11 J2.12 J2.13 P2.9 P2.10 P2.11 P2.13 S1.M U1.11 U5.5 U5.6 U5.7

## Polygon pours and split planes (outlines as drawn)
GND on Bottom Layer "Bottom_Layer_GND" (solid, remove dead copper, pour order 8): 100,100 6750,100 6750,6530 100,6535
GND on Top Layer "Top_Layer_GND" (solid, remove dead copper, pour order 10): 105,88 6738,88 6750,100 6750,6535 100,6535

## Other copper
Top Layer:
  text "PAWAN KUMAR DHAKAL" at 4442,6337 h100
  text "POWER PORT" at 1520,6219 h60
  text "TADELE LIJALEM YIRISAW" at 4258,6149 h100
  text "CURRENT_OUT_U" at 6502,4719 h100 r90
  text "ADC CONNECTOR" at 2110,4330 h60 r90
  text "BUFFER" at 2278,3967 h60
  text "CURRENT_OUT_V" at 6500,3280 h100 r90
  text "PWM CONNECTOR" at 3822,2825 h60 r90
  text "RESET" at 939,2649 h60
  text "COMPARATOR" at 2344,1093 h60
  text "LED POWER" at 6549,632 h60 r180
  text "LED FAULT" at 5975,629 h60 r180
  text "LED 24V" at 5405,627 h60 r180
  text "LED 500V" at 4939,619 h60 r180
  text "LED_PWM" at 4417,610 h60 r180
  text "PWM SWITCH" at 3538,123 h60 r90

## Silkscreen, mask and mechanical layers (free items; w line width, h text height)
Bottom Overlay:
  the board outline again, w10

## Text inside footprints (layer, text, board x,y; h text height)
J1: Top Overlay "25" at 551.85,3847.58 h59.06 r90; Top Overlay "14" at 440.71,5036.38 h59.06 r90; Top Overlay "13" at 1010,3760 h59.06 r90; Top Overlay "1" at 935,5015 h59.06 r90
J2: Top Overlay "1" at 920.95,2168.03 h59.06 r90; Top Overlay "13" at 919.96,949.88 h59.06 r90; Top Overlay "14" at 545.95,2199.94 h59.06 r90; Top Overlay "25" at 545.95,1009.15 h59.06 r90
P2: Top Overlay "16" at 2330,4240 h50 r270; Top Overlay "8" at 2230,4240 h50 r270; Top Overlay "1" at 2230,5120 h50 r270; Top Overlay "9" at 2330,5120 h50 r270
P3: Top Overlay "16" at 3481,2758 h50 r270; Top Overlay "8" at 3381,2758 h50 r270; Top Overlay "1" at 3381,3638 h50 r270; Top Overlay "9" at 3481,3638 h50 r270